# EAGLE board PicKat-pcb-v1 (EAGLE 7.1.0)
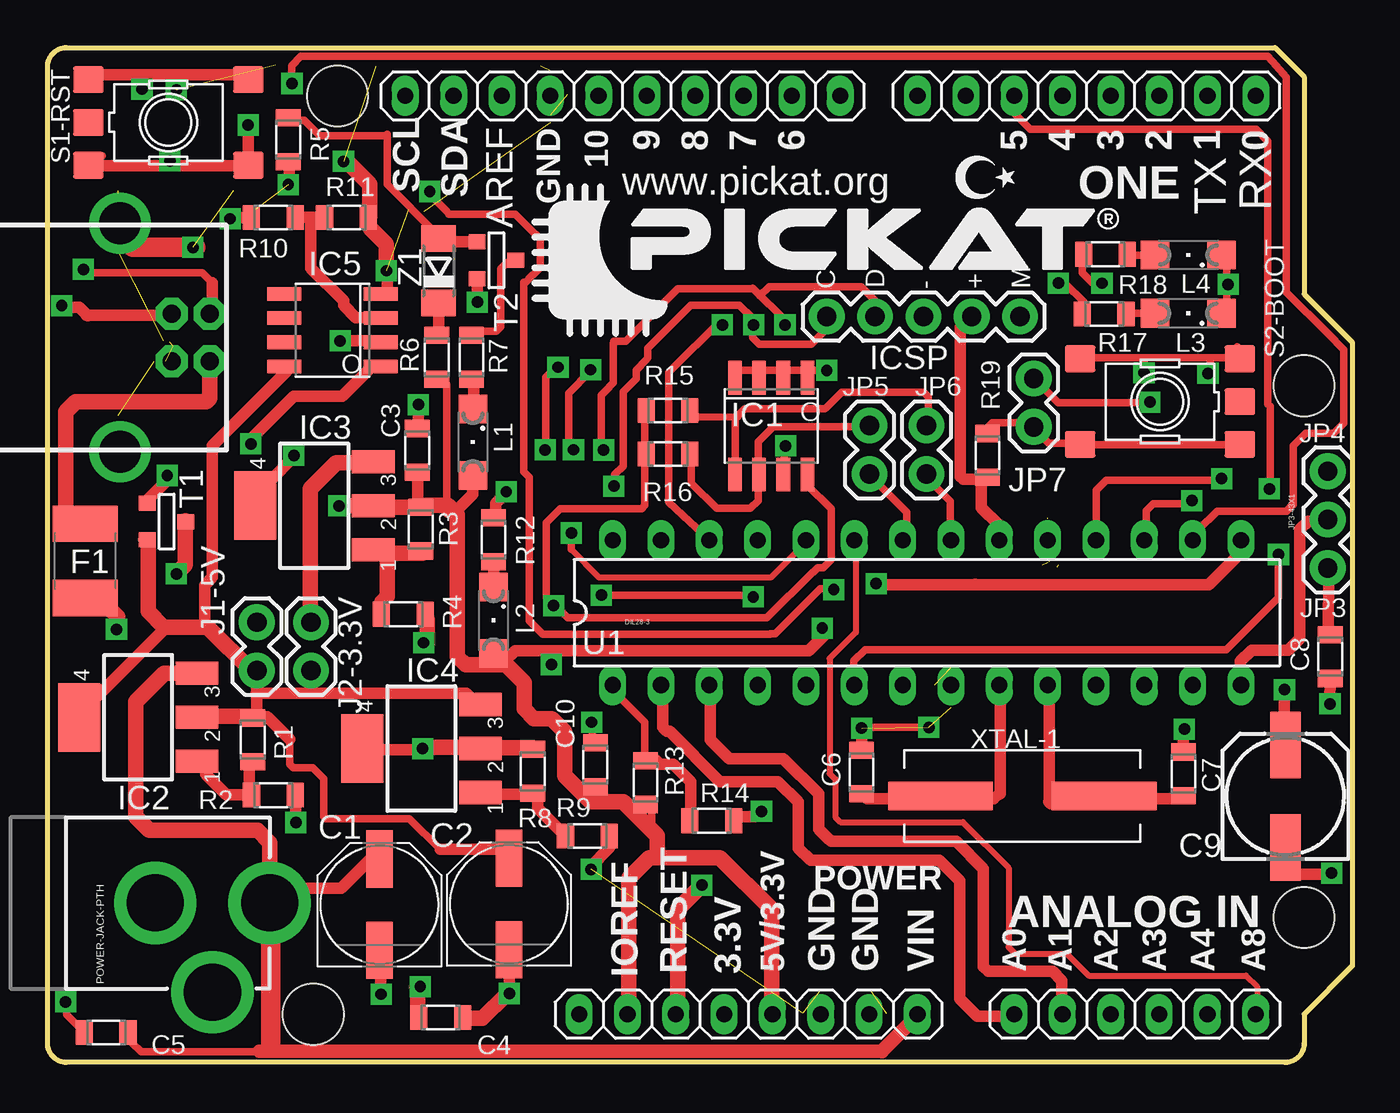
[diagram p0: board, top side]
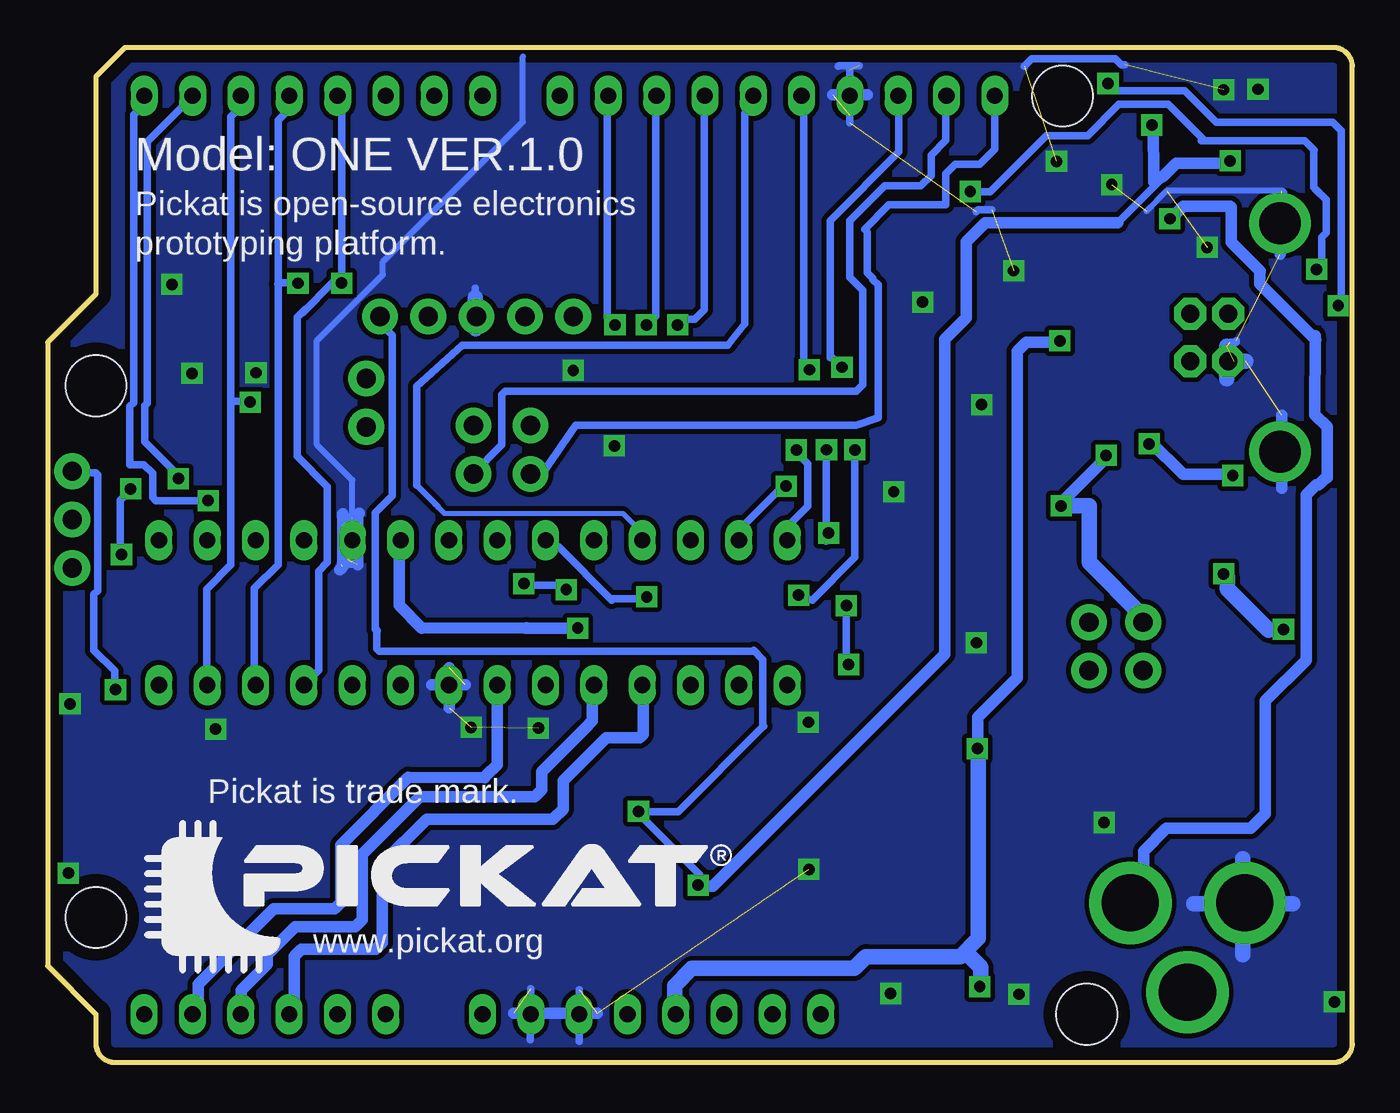
[diagram p1: board, bottom side, seen from below]

Size 68.58 x 53.34 mm. Coordinates in mm from the lower left corner, seen from the top.
Outline: 64.52,53.34 66.04,51.82 66.04,40.39 68.58,37.85 68.58,5.08 66.04,2.54 66.04,1 arc-90 65.04,0 1,0 arc-90 0,1 0,52.34 arc-90 1,53.34 64.52,53.34
Copper layers (1*16): Top 0.035mm / dielectric 1.5mm / Bottom 0.035mm
Design rules "default": minimum track width 10mil, minimum drill 22mil, track to track 10mil, track to pad 10mil, pad to pad 10mil, via to via 12mil, smd to smd 8mil, copper to edge 26mil, drill to drill 12mil, minimum pad ring 10mil, minimum via ring 10mil, stop-mask expansion 1mil, vias tented up to drill 30mil, thermal gap 10mil
Net classes: 0 default: width 0.254 mm, clearance 0.254 mm; 1 power: width 0.61 mm, drill 0.61 mm, clearance 0.254 mm; 2 gnd: width 0.305 mm, drill 0.559 mm, clearance 0.254 mm; 3 usbvcc: width 0.508 mm, drill 0.61 mm, clearance 0.254 mm; 4 aref: width 0.406 mm, drill 0.61 mm, clearance 0.254 mm
Holes 3.2 mm at 66.04,35.56 66.04,7.62 15.24,50.8 13.97,2.54

## Footprints (pad centres in the part's own frame; a part is rotated, then mirrored left to right if it is on the bottom)
1X06 = drill 0.85 pad 1.422 long: 1 -6.35,0; 2 -3.81,0; 3 -1.27,0; 4 1.27,0; 5 3.81,0; 6 6.35,0
PANASONIC_D = smd 3 x 1.4: + 2.4,0; - -2.4,0
WCAP-CSGP_0805_WAVE = smd 0.9 x 1.3: 1 -1.15,0; 2 1.15,0
153CLV-0605 = smd 3.5 x 1.6: + 2.7,0; - -2.7,0
L1812 = smd 1.9 x 3.4: 1 -1.95,0; 2 1.95,0
SO08-IRF = smd 0.72 x 1.78: 1 -1.905,-2.543; 2 -0.635,-2.543; 3 0.635,-2.543; 4 1.905,-2.543; 5 1.905,2.543; 6 0.635,2.543; 7 -0.635,2.543; 8 -1.905,2.543
SOT223 = smd 1.219 x 2.235: 1 -2.311,-3.099; 2 0,-3.099; 3 2.311,-3.099 | smd 3.6 x 2.2: 4 0,3.099
1X05 = drill 1.016 pad 1.88: 1 0,0; 2 2.54,0; 3 5.08,0; 4 7.62,0; 5 10.16,0
1X08 = drill 0.85 pad 1.422 long: 1 -8.89,0; 2 -6.35,0; 3 -3.81,0; 4 -1.27,0; 5 1.27,0; 6 3.81,0; 7 6.35,0; 8 8.89,0
1X10 = drill 0.85 pad 1.422 long: 1 -11.43,0; 2 -8.89,0; 3 -6.35,0; 4 -3.81,0; 5 -1.27,0; 6 1.27,0; 7 3.81,0; 8 6.35,0; 9 8.89,0; 10 11.43,0
1X02 = drill 1.016 pad 1.88: 1 0,0; 2 2.54,0
1X03 = drill 1.016 pad 1.88: 1 0,0; 2 2.54,0; 3 5.08,0
SML1206 = smd 1.5 x 1.5: A 1.75,0; C -1.75,0
POWER_JACK_PTH = drill 2.997 pad 4.318: GND 0,7.7; GNDBREAK 4.7,10.7; PWR 0,13.7
TS42 = smd 1.6 x 1.4: 1 -4.2,2.25; 2 4.2,2.25; 3 -4.2,-2.25; 4 4.2,-2.25; 5 -4.2,0
SOT-23 = smd 0.787 x 0.889: 1 0.025,-1.016; 2 -0.94,1.016; 3 0.991,1.016
DIL28-3 = drill 0.85 pad 1.422 long: 1 -16.51,-3.81; 2 -13.97,-3.81; 3 -11.43,-3.81; 4 -8.89,-3.81; 5 -6.35,-3.81; 6 -3.81,-3.81; 7 -1.27,-3.81; 8 1.27,-3.81; 9 3.81,-3.81; 10 6.35,-3.81; 11 8.89,-3.81; 12 11.43,-3.81; 13 13.97,-3.81; 14 16.51,-3.81; 15 16.51,3.81; 16 13.97,3.81; 17 11.43,3.81; 18 8.89,3.81; 19 6.35,3.81; 20 3.81,3.81; 21 1.27,3.81; 22 -1.27,3.81; 23 -3.81,3.81; 24 -6.35,3.81; 25 -8.89,3.81; 26 -11.43,3.81; 27 -13.97,3.81; 28 -16.51,3.81
PN61729 = drill 0.95 pad 1.676 octagon: 1 1.25,4.71; 2 -1.25,4.71; 3 -1.25,2.71; 4 1.25,2.71 | drill 2.2: P$1 -6,0; P$2 6,0
CRYSTAL-SMD-10.5X4.8-2PIN = smd 5.5 x 1.5: P$1 -4.3,0; P$2 4.3,0
SOD80C = smd 1.4 x 1.8: A 1.7,0; C -1.7,0

## Placement (x,y rotation side)
ADC-1X6  1X6-disi-HEADER-2  [1X06]  57.15,2.54 0 top
C1  100MF/25V SMD  [PANASONIC_D]  17.45,8.29 90 top
C2  100MF/25V SMD  [PANASONIC_D]  24.25,8.32 90 top
C3  220NF  [WCAP-CSGP_0805_WAVE]  19.43,32.17 270 top
C4  220NF  [WCAP-CSGP_0805_WAVE]  20.66,2.36 180 top
C5  100NF  [WCAP-CSGP_0805_WAVE]  3.08,1.57 0 top
C6  22PF  [WCAP-CSGP_0805_WAVE]  42.78,15.26 90 top
C7  22PF  [WCAP-CSGP_0805_WAVE]  59.7,15.16 90 top
C8  220NF  [WCAP-CSGP_0805_WAVE]  67.41,21.33 90 top
C9  100MF/25V SMD  [153CLV-0605]  65.06,13.99 90 top
C10  100NF  [WCAP-CSGP_0805_WAVE]  28.79,15.65 90 top
F1  500mA  [L1812]  1.98,26.36 90 top
IC1  24C02 SMD EEPROM  [SO08-IRF]  38.03,33.44 180 top
IC2  LM317-SMD-SOT223  [SOT223]  4.76,18.14 90 top
IC3  LM317-SMD-SOT223  [SOT223]  14.02,29.26 90 top
IC4  LM317-SMD-SOT223  [SOT223]  19.64,16.5 90 top
IC5  LM358 SMD  [SO08-IRF]  14.97,38.49 90 top
ICSP  BOS  [1X05]  40.95,39.2 0 top
IO-1X8  1x8-disi-HEADER-3  [1X08]  54.61,50.8 180 top
IO-1X10  1X10-disi-HEADER-4  [1X10]  30.23,50.8 180 top
J1-5V  1X2-12MM-ERKEK-HEADER-1  [1X02]  11,20.6 90 top
J2-3.3V  1X2-12MM-ERKEK-HEADER-2  [1X02]  13.85,20.6 90 top
JP3-43X1  1X3-12MM-ERKEK-HEADER-3  [1X03]  67.28,25.99 90 top
JP5  1X2-12MM-ERKEK-HEADER-4  [1X02]  43.2,30.93 90 top
JP6  1X2-12MM-ERKEK-HEADER-5  [1X02]  46.2,30.93 90 top
JP7  MALE-HEADER-6  [1X02]  51.83,33.41 90 top
L1  mavi-1206  [SML1206]  22.35,32.6 270 top
L2  KIRMIZI-1206  [SML1206]  23.44,23.24 270 top
L3  KIRMIZI-1206  [SML1206]  59.95,39.38 180 top
L4  KIRMIZI-1206  [SML1206]  59.96,42.44 180 top
POWER  1X8-disi-HEADER-1  [1X08]  36.83,2.54 0 top
POWER-JACK-PTH  POWER-JACK-2.1MM  [POWER_JACK_PTH]  -2.03,8.38 270 top
R1  330 OHM  [WCAP-CSGP_0805_WAVE]  10.79,16.96 270 top
R2  1K  [WCAP-CSGP_0805_WAVE]  11.87,14.05 180 top
R3  330 OHM  [WCAP-CSGP_0805_WAVE]  19.62,28.03 270 top
R4  560 OHM  [WCAP-CSGP_0805_WAVE]  18.7,23.56 0 top
R5  330 OHM  [WCAP-CSGP_0805_WAVE]  12.65,48.49 90 top
R6  1K  [WCAP-CSGP_0805_WAVE]  20.45,37.07 270 top
R7  1K  [WCAP-CSGP_0805_WAVE]  22.28,37.07 270 top
R8  330 OHM  [WCAP-CSGP_0805_WAVE]  25.49,15.31 270 top
R9  560 OHM  [WCAP-CSGP_0805_WAVE]  28.37,11.9 0 top
R10  10K  [WCAP-CSGP_0805_WAVE]  11.86,44.41 180 top
R11  10K  [WCAP-CSGP_0805_WAVE]  15.71,44.41 180 top
R12  1K  [WCAP-CSGP_0805_WAVE]  23.43,27.47 90 top
R13  10K  [WCAP-CSGP_0805_WAVE]  31.42,14.71 90 top
R14  470 OHM  [WCAP-CSGP_0805_WAVE]  34.91,12.7 0 top
R15  10K  [WCAP-CSGP_0805_WAVE]  32.61,34.26 180 top
R16  10K  [WCAP-CSGP_0805_WAVE]  32.61,31.98 180 top
R17  2.2K  [WCAP-CSGP_0805_WAVE]  55.53,39.34 180 top
R18  2.2K  [WCAP-CSGP_0805_WAVE]  55.6,42.47 180 top
R19  2.2K  [WCAP-CSGP_0805_WAVE]  49.4,31.91 90 top
S1-RST  SMD TACT sivic  [TS42]  6.35,49.4 0 top
S2-BOOT  SMD TACT sivic  [TS42]  58.47,34.73 180 top
T1  FDN340P-IRLML6402P-IRLML5203P-IRLML6401TRPBF  [SOT-23]  6.25,28.4 90 top
T2  BC847  [SOT-23]  23.59,42.13 90 top
U1  DIL28-3  [DIL28-3]  46.21,23.64 0 top
USB-B  USB-B  [PN61729]  3.81,38.1 270 top
XTAL1  20mhz smd 10.5X4.8-2-pin  [CRYSTAL-SMD-10.5X4.8-2PIN]  51.23,14 0 top
Z1  3.9V zener SOD80C  [SOD80C]  20.55,41.61 90 top

## Library data of the parts
ADC-1X6 IO-1X8 IO-1X10 POWER S1-RST S2-BOOT U1 USB-B = SmartPrj
C1 C2 F1 = rcl
C3-C8 C10 R1-R19 = Eagle_Wurth_Elektronik_Passive_Capacitors_rev15a
C9 = ref-packages
IC1 IC5 = transistor-fet
IC2-IC4 = linear
ICSP J1-5V J2-3.3V JP3-43X1 JP5-JP7 POWER-JACK-PTH XTAL1 = SparkFun
L1-L4 = led
T1 T2 = zetex
Z1 = diode

## Nets
5-GND: S1-RST.5
S$6: S1-RST.3

## Tracks (layer width: path | path; a pad name or v marks a point on that pad's centre or on a via)
GND  (via drill 0.6)  (23 unrouted)
  Top 0.61: v67.4,18.85 67.41,20.23 | v22.59,39.96 22.59,41.04
  Bottom 0.305: 3.72,45.81 9.75,45.81 10.82,44.74 | 52.56,28.56 52.56,30.61 54.42,32.47 54.42,37.94 50.96,41.4 50.96,42.07 43.59,49.44 43.59,52.86 | 53.16,26.16 53.14,26.16 52.84,26.47
  Bottom 0.406: 6.42,37.86 6.12,37.86 6.12,37.94 | 17.25,52.36 16.85,52.75 12.46,52.75 12.15,52.45 11.96,52.45 | 19.76,44.72 19.66,44.82 18.95,44.82 | 40.63,1.12 40.63,3.83 | 43.2,1.18 43.19,3.87 | 27.02,52.36 26.99,52.38 25.91,52.38 | 26.42,52.14 26.42,49.77 26.41,49.38 | 46.1,40.69 46.11,40.19
  Bottom 0.61: 52.58,28.63 52.58,26.28 52.61,26.31 52.61,26.28 | 3.78,42.49 3.78,45.63 3.72,45.69 | 3.71,30.18 3.72,34.02 | 5.71,10.78 5.78,10.72 | 3.08,8.41 3.14,8.35 | 39.7,2.58 44.08,2.58 | 25.5,50.86 27.31,50.86 | 47.47,20.74 47.47,18.65 | 46.64,19.84 48.38,19.84 | 52.28,26.16 52.28,28.78 52.2,28.86 | 53.08,28.83 53.08,26.06 53.24,25.9
  Bottom 0.813: 6.6,37.65 6.6,35.92 | 5.62,36.86 6.22,36.86 6.24,36.84 | 5.78,10.72 5.78,5.65 | 3.14,8.35 8.34,8.35 | 46.11,40.19 46.09,38.56
  other vias: 17.53,3.58 17.81,41.61 7.64,42.84 4.96,51.15 6.77,51.12 67.48,9.95 0.95,3.19 24.27,3.62 59.74,17.52 13.05,12.61 19.76,22.06 28.57,10.15 15.55,47.36 12.65,46.14 19.49,34.57 24.11,30 40.95,36.38 28.6,17.88 38.79,32.41 42.78,17.57 46.32,17.61 57.63,36.25 60.99,36.22 62.05,40.89
  pour Bottom (isolate 0.254): 0.7,0.39 65.41,0.39 65.41,2.83 65.41,2.83 68.29,5.72 68.29,37.5 65.47,40.32 65.47,51.81 64.13,53.16 1.23,53.16 0.52,52.45 0.52,0.58 0.66,0.43
S$1
  Top 0.61: 17.48,11.22 15.43,9.16 12.8,9.16
S$2
  Top 0.61: 17.49,3.58 17.52,3.62 17.52,4.69
S$3
  Top 0.61: 24.25,3.6 24.25,4.71
S$4
  Bottom 0.406: 53.12,41.06 53.12,50.17 53.15,50.2
S$5
  Top 0.813: 17.81,41.62 17.81,43 16.96,43.86
S$6
  Top 0.406: 2.88,47.66 S1-RST.3
S$7
  Top 0.406: 4.43,1.05 4.92,0.55 11.26,0.55 11.74,1.03
  Top 1.016: 11.74,1.03 11.74,6.32
S$8
  Bottom 0.61: 6.5,47.25 9.26,47.26 9.96,46.56
S$9
  Top 0.406: 1.01,3.19 1.01,2.5 1.77,1.74
S$10
  Top 0.7: 43.85,0.58 11.12,0.58
  Top 0.74: 45.74,2.47 43.85,0.58
S$11
  Top 0.813: 7.19,20.47 6.13,20.47 4.63,18.97 4.63,12.91 5.34,12.2 11.04,12.2 11.68,11.55 11.68,9.63
S$12
  Top 0.61: 10.63,18.19 10.71,18.11
  Top 0.813: 8.65,18.19 10.63,18.19
S$13
  Top 0.61: 10.59,14.27 10.59,15.63 10.55,15.67
S$14
  Top 0.61: 8.32,15.76 8.32,15.13 9.4,14.06 10.29,14.06 10.3,14.05
S$15  (via drill 0.6)
  other vias: 27.53,27.83
S$16
  Top 0.61: 13.05,12.58 13.05,13.78 13.01,13.81
S$17
  Top 0.406: 12.74,16.97 12.74,15.67 12.91,15.5 13.94,15.5 14.52,14.91 14.52,12.92 14.63,12.82 19.02,12.82 20.64,11.2
  Top 0.61: 11.06,18.18 11.54,18.18 12.74,16.97 | 20.64,11.2 23.76,11.2 23.83,11.13 23.84,11.13 23.84,11.14
S$18
  Top 0.61: 10.99,20.61 10.99,18.27 10.97,18.25
S$19
  Top 0.61: 13.87,20.66 13.87,19.51
S$20
  Top 0.61: 22.58,18.82 22.01,19.39 10.97,19.39
S$21
  Top 0.61: 23.33,16.58 23.38,16.54
  Top 0.813: 23.38,16.54 25.52,16.54
S$22
  Top 0.61: 27.21,11.92 25.77,13.36 25.77,13.94
S$23
  Top 0.61: 23.25,14.06 23.29,14.11 25.27,14.11
S$24
  Bottom 0.406: 55.14,19.82 54.34,20.62 54.34,25.81 53.9,26.25
S$25
  Top 0.61: 29.56,11.88 29.56,11.3 28.49,10.23
S$26
  Bottom 0.813: 35.63,2.56 35.63,4.04 34.72,4.95 26.18,4.95 25.57,5.57 20.62,5.57 19.67,6.52 19.67,16.33 19.63,16.37
S$27  (via drill 0.6)
  other vias: 19.71,16.5
S$28
  Top 0.813: 21.98,16.58 19.59,16.58
S$29
  Top 0.813: 33.11,2.39 33.11,8.04 34.14,9.07
S$30  (via drill 0.6)
  other vias: 34.39,9.32
S$31
  Top 0.813: 38.06,2.68 38.06,8.04 35.34,10.76 31.63,10.76 30.55,9.69 30.55,2.64 30.51,2.6
S$32
  Top 0.813: 13.81,23.05 13.81,30.15 15.17,31.51 16.9,31.51 17.02,31.63
S$33
  Top 0.813: 17.63,29.19 19.47,29.19 19.53,29.25
S$34
  Top 0.813: 17.92,26.75 19.7,26.75
S$35
  Top 0.813: 17.86,26.75 17.86,24.5 17.57,24.2
S$36
  Bottom 0.406: 51.27,22.69 51.35,22.78 51.35,26.3
S$37
  Top 0.813: 19.94,22 19.94,23.31 19.88,23.37
S$38
  Bottom 0.813: 11.04,23.07 11.04,23.49 13.83,26.28 13.83,29.25 14.96,29.25 15.02,29.31 14.96,29.31
S$39  (via drill 0.6)
  other vias: 15.31,29.25
S$40
  Top 0.813: 15.49,29.25 16.2,29.25 16.2,29.31
S$41  (via drill 0.6)
  other vias: 19.59,3.98
S$42
  Top 0.813: 19.47,2.5 19.47,3.92 19.41,3.98
S$43
  Bottom 0.813: 19.53,3.98 19.53,5 20.12,5.59
S$44
  Top 0.813: 22.02,2.32 22.85,2.32 24.1,3.57
S$45
  Top 0.813: 10.98,20.75 10.57,20.75
S$46
  Top 0.813: 10.86,20.57 10.75,20.57 8.43,22.89 6.12,22.89 5.28,23.72 5.28,27.34 5.16,27.46
S$47  (via drill 0.6)
  other vias: 6.77,25.68
S$48
  Top 0.813: 7.24,28.47 7.24,26.16 6.83,25.74
S$49  (via drill 0.6)
  other vias: 3.62,22.77
S$50
  Bottom 0.813: 6.59,25.56 6.59,24.9 4.39,22.71 3.5,22.77
S$51
  Top 0.813: 2.97,23.84 2.73,24.07
S$52
  Top 0.61: 8.25,23.06 8.25,25.09 8.66,25.5 8.66,32.4 12.58,36.32
S$53  (via drill 0.6)
  other vias: 6.29,30.85
S$54  (via drill 0.6)
  other vias: 10.68,32.52
S$55
  Bottom 0.61: 6.35,30.91 8.9,30.91 10.62,32.63
S$56
  Top 0.61: 6.23,30.79 6.23,30.55 5.28,29.6
S$57
  Top 0.61: 10.56,32.52 10.56,32.64 12.94,35.01 15.49,35.01 16.86,36.38
S$58
  Top 0.61: 4.48,42.84 3.79,43.53 3.79,43.48
  Top 1.016: 7.8,42.84 4.48,42.84
S$59
  Top 0.61: 17.86,41.61 17.86,40.54 17.92,40.48
S$60
  Bottom 0.61: 19.7,16.52 19.7,18.13 17.63,20.21 17.63,37.39 17.15,37.87 15.73,37.87
S$61  (via drill 0.6)
  other vias: 15.37,37.92
S$62
  Top 0.61: 15.43,37.92 17.27,37.92
S$63
  Top 0.813: 3.68,22.65 3.68,23.42 3.15,23.95
S$65
  Top 0.61: 17.03,39.14 16.21,39.14 15.56,39.79 15.56,40.03 13.84,41.75 13.84,44.4 13.87,44.43 | 13.19,44.43 13.87,44.43 | 13.87,44.43 14.49,44.43
S$66
  Bottom 0.61: 10.98,9.56 10.98,11.11 9.79,12.3 5.34,12.3 4.57,13.07 4.57,19.01 2.43,21.15 2.43,29.83 1.9,30.36 1.78,30.36 1.42,30.72
S$68
  Top 0.61: 9.55,44.39 10.78,44.39
S$69  (via drill 0.6)
  other vias: 9.6,44.34
S$70
  Top 0.813: 32.05,10.79 32.05,11.91 30.25,13.7 28.55,13.7 27.18,15.07 27.18,17.39 26.5,18.07 25.56,18.07 25.04,18.58 25.04,19.95 24.1,20.89 21.97,20.89 21.54,21.32 21.54,28.77 21.02,29.29 19.83,29.29 19.74,29.2
S$72
  Top 0.813: 16.92,44.45 16.92,46.16 15.73,47.36
S$73
  Top 0.61: 19.45,33.4 19.47,33.4 19.47,34.57
S$74
  Top 0.61: 19.59,29.31 19.47,29.31 19.47,30.92
S$75
  Bottom 0.406: 53.87,26.3 53.87,30.26 55.47,31.86 55.47,39.16 55.05,39.58
S$76
  Top 0.61: 12.74,46.11 12.7,46.11 12.7,47.06
S$77
  Top 0.61: 20.53,38.4 20.57,38.4 20.57,39.76
S$78
  Top 0.406: 20.41,43.59 17.85,46.15 17.85,48.79 17.77,48.71 14.3,48.71 13.48,49.53 12.95,49.53
S$79
  Top 0.406: 20.78,35.84 20.98,35.63 20.98,28.83
S$80
  Top 0.61: 22.59,43.14 21.11,43.14
S$81
  Bottom 0.406: 53.23,40.97 53.62,40.97 55.17,39.41
S$82
  Top 0.406: 24.55,42.03 24.14,42.03 23.82,41.71 23.82,38.66 23.57,38.42 22.79,38.42 22.75,38.37
S$83
  Top 0.61: 22.41,34.83 22.41,35.78 22.43,35.8
S$84
  Top 0.61: 22.36,30.24 22.36,29.86 21.46,28.97
S$85
  Top 0.61: 23.45,25.19 23.45,26.08 23.42,26.11
S$86
  Top 0.406: 54.45,39.67 54.45,39.97 53.5,40.93
S$87
  Top 0.61: 23.56,28.93 23.56,29.38 24,29.82
S$88
  Top 0.813: 8.54,36.75 8.54,34.92 8.35,34.73 1.48,34.73 0.95,34.2 0.95,28.93 1.07,28.81
S$89  (via drill 0.6)
  other vias: 12.85,51.45
S$90
  Top 0.406: 64.37,52.63 64.12,52.87 13.31,52.87 12.83,52.39 12.83,51.32
S$91  (via drill 0.6)
  other vias: 37.52,13.2
S$92
  Bottom 0.406: 34.31,9.25 34.31,9.88 37.49,13.05
S$93
  Top 0.406: 37.17,12.91 37.46,13.2
  Top 0.61: 36.17,12.91 37.17,12.91
S$94
  Top 0.406: 31.75,12.62 31.75,13.32
S$95
  Top 0.406: 31.38,15.93 31.38,17.88 29.93,19.33
S$96
  Top 0.61: 33.8,12.95 33.8,14.74 32.87,15.67 32.19,15.67 31.95,15.91
S$97
  Top 0.61: 31.95,15.91 31.91,15.95
S$98
  Bottom 0.254: 48.06,29.22 48.06,29.18 47.74,28.86 38.35,28.86 37.43,27.94
S$99
  Top 0.406: 10.76,51.91 10.76,51.7
  Top 0.61: 2.28,51.91 10.76,51.91
S$100
  Bottom 0.305: 48.06,29.21 48.23,29.38
S$101
  Top 0.61: 2.28,47.13 10.33,47.13
S$102  (via drill 0.6)
  Top 0.61: 10.61,47.2 10.54,47.2 v10.54,49.27 10.54,49.34
S$103  (via drill 0.6)
  other vias: 6.43,47.39
S$104
  Bottom 0.406: 12.32,44.14 9.76,46.7
  Bottom 0.61: 34.54,9.27 33.63,9.27 21.44,21.46 21.44,38.01 20.3,39.15 20.3,43.14 19.3,44.14 12.32,44.14
S$105
  Bottom 0.61: 10.47,49.41 10.45,46.29
S$106
  Top 0.61: 50.07,19.89 50.07,14.12
S$107
  Top 0.61: 52.63,19.82 52.63,13.69
S$108
  Top 0.61: 32.34,19.82 32.34,17.61 32.55,17.4 32.69,17.4 35.33,14.76 38.39,14.76 39.46,13.69 39.46,11.27 40.1,10.62 46.86,10.62 47.93,9.55 47.93,3.35 48.86,2.42 50.99,2.42 51.07,2.35
S$109
  Top 0.61: 34.83,19.82 34.83,16.97 35.83,15.97 38.67,15.97 40.52,14.12 40.52,12.26 41.09,11.69
S$110
  Top 0.61: 50.03,14.16 49.73,13.85 49.31,13.85
S$111
  Top 0.61: 52.61,13.71 52.71,13.61 53.16,13.61
S$112
  Top 0.61: 41.15,11.67 41.19,11.63 47.75,11.63 49.19,10.19 49.19,5.03 49.44,4.78 52.82,4.78 53.31,4.29 53.31,2.68
S$113
  Bottom 0.61: 37.27,19.8 37.27,17.24 37.45,17.06 39.23,17.06 41.49,14.8 41.49,13.32 42.02,12.78 48.66,12.78 50.98,10.46 50.98,6.3 51.34,5.95 55.26,5.95 55.61,5.59 55.61,2.62 55.97,2.26
S$114
  Bottom 0.61: 39.94,19.74 39.94,17.95 40.36,17.54 42.62,15.28 42.62,14.33 42.97,13.97 49.02,13.97 52.05,10.94 52.05,7.49 52.41,7.13 55.55,7.13 57.04,5.65 57.04,5.17 58.4,3.81 58.4,2.79
S$115
  Bottom 0.61: 45.61,14.95 49.62,14.98 53.18,11.42 53.18,8.38 53.48,8.09 56.68,8.09 60.66,4.11 60.66,2.97
S$116
  Bottom 0.61: 44.96,19.89 44.96,15.66 45.53,15.09
S$117
  Top 0.305: 42.48,27.57 42.48,22.61 41.11,21.24 41.11,15.18 41.4,14.89 41.4,12.9 41.66,12.63 48.1,12.63 50.51,10.23 50.51,6.06 50.86,5.71 53.57,5.71 54.71,4.57 62.98,4.57 63.57,3.98 63.57,2.82 63.53,2.78
S$118
  Top 0.61: 44.61,13.86 43.08,13.86 43.03,13.91
S$119
  Top 0.61: 59.7,13.86 57.82,13.86
S$120
  Top 0.406: 42.81,17.61 46.47,17.61
S$121
  Top 0.305: 39.84,27.32 38,25.48 29,25.48 27.52,26.96
  Top 0.406: 27.52,26.96 27.52,27.51 27.57,27.56 | 39.84,27.32
S$122
  Top 0.61: 42.8,17.58 42.8,16.55 42.77,16.53 42.77,16.5
S$123
  Top 0.61: 59.68,17.51 59.68,16.41 59.73,16.36
S$124  (via drill 0.6)
  other vias: 37.09,24.47
S$125
  Bottom 0.406: 12.88,51.41 12.54,51.07 8.81,51.07 7.16,49.42 6.57,49.42
S$126
  Top 0.61: 67.33,25.83 67.3,22.54
S$127
  Bottom 0.406: 42.37,27.09 41.73,27.09 38.94,24.3
S$128
  Bottom 0.406: 38.98,24.36 37.42,24.36 37.38,24.4
S$129
  Top 0.61: 67.53,9.9 65.5,9.9 65.45,9.95
S$130
  Top 0.61: 67.28,28.46 66.25,28.46 65.8,28.01 65.8,22.27 65.21,21.68 63.28,21.68 62.68,21.08 62.68,20.24 62.78,20.14
S$131  (via drill 0.6)
  Top 0.61: v65.01,19.6 65.01,18.06 65.16,17.92
S$132
  Bottom 0.406: 65.06,19.45 65.06,20.59 66.15,21.68 66.15,24.6 65.95,24.8 65.95,30.88 66.05,30.98 67.19,30.98 67.23,31.03
S$133
  Top 0.61: 23.8,21.4 24.33,21.4 24.57,21.64 40,21.64 40.83,22.47
S$134  (via drill 0.6)
  Bottom 0.61: v40.72,22.83 43.45,22.83
S$135
  Bottom 0.61: 43.41,22.84 48.9,22.83 50.09,24.02 50.09,27.23
S$136
  Top 0.406: 65.47,29.31 65.47,32.4 66.12,33.06 67.6,33.06 68.14,33.59 68.14,37.46 67.31,38.29 65.11,40.49 65.11,51.79 64.4,52.6
S$137
  Bottom 0.406: 6.63,49.43 1.04,49.43 0.59,48.98 0.59,39.92
S$138  (via drill 0.6)
  other vias: 29.1,24.56
S$142
  Top 0.61: 43.58,25.1 48.71,25.1 48.74,25.1 | 48.74,25.1 48.75,25.12 | 48.74,25.1 61.03,25.1 62.73,26.8
S$143  (via drill 0.6)
  other vias: 41.32,24.86
S$144
  Top 0.406: 37.97,22.52 26.02,22.52 25.32,23.22 25.32,30.77 25.03,31.06 25.03,40.99
S$145  (via drill 0.6)
  other vias: 20.09,45.77
S$146
  Top 0.406: 20.14,45.73 20.14,45.58 20.98,44.73
S$147
  Bottom 0.406: 41.36,25.09 43.53,25.09
S$148
  Bottom 0.406: 20.09,45.77 19.03,45.77 16.08,48.72 13.91,48.72 12.28,50.35 9.67,50.35 7.87,48.55
S$149
  Bottom 0.406: 7.95,48.44 2.51,48.44 2.02,47.95
S$150
  Bottom 0.406: 1.62,41.83 1.62,43.37 1.39,43.61 1.39,45.34 1.95,45.9
S$151
  Top 0.406: 2.12,41.52 8.12,41.52 8.65,40.98 | 8.65,39.54 8.74,39.45
  Top 0.61: 8.65,40.98 8.65,39.54
S$152  (via drill 0.6)
  other vias: 1.89,41.68
S$153
  Bottom 0.406: 2.05,47.96 2.05,46 1.75,45.7
S$154  (via drill 0.6)
  other vias: 0.74,39.78
S$155
  Top 0.61: 6.53,39.27 2.03,39.27
S$156
  Top 0.406: 42.38,20.16 42.38,21.11 42.97,21.7 61.96,21.7 64.69,24.44 64.69,26.64 64.63,26.7
S$157  (via drill 0.6)
  other vias: 64.69,26.7
S$158  (via drill 0.6)
  other vias: 64.22,30.14
S$159
  Bottom 0.406: 64.75,26.7 64.75,29.55 64.22,30.08
S$160
  Top 0.406: 64.26,30.15 64.26,34.48 64.14,34.6 64.14,48.42 63.52,49.04 51.65,49.04 50.78,49.9
S$161
  Bottom 0.406: 28.46,24.33 28.83,24.33 28.85,24.31
S$162
  Bottom 0.406: 57.71,19.84 57.71,24.91 56.47,26.15 56.47,49.53 55.85,50.15
S$163
  Bottom 0.406: 60.22,19.84 60.22,24.87 58.94,26.15 58.94,49.7 58.32,50.32
S$164
  Top 0.406: 57.75,27.43 57.75,28.99 58.12,29.36 59.64,29.36 59.68,29.41
S$165  (via drill 0.6)
  Bottom 0.406: v60.14,29.53 62.9,29.53 63.06,29.7 63.06,30.97 63.52,31.43 64.26,31.43 64.26,34.48 64.05,34.69 64.05,49.82 63.35,50.52
S$166
  Top 0.406: 55.11,27.47 55.11,30.07 55.65,30.6 61.58,30.6 61.62,30.56
S$167  (via drill 0.6)
  other vias: 61.7,30.68
S$168
  Bottom 0.406: 61.74,30.68 61.74,30.89 63.48,32.62 63.48,34.52 63.35,34.64 63.35,48.38 61.29,50.44
S$169  (via drill 0.6)
  other vias: 57.93,34.7
S$170
  Bottom 0.406: 57.97,34.74 58.79,34.74 58.83,34.77
S$171
  Top 0.406: 58,34.67 53.13,34.67 51.89,35.91
S$172
  Top 0.406: 51.51,33.64 52.61,32.54 54.16,32.54
S$173
  Top 0.406: 54.81,32.47 62.74,32.47
S$174
  Top 0.406: 29.12,24.55 36.89,24.55 36.91,24.52
S$176
  Top 0.406: 54.53,37.04 62.6,37.04
S$177
  Top 0.406: 62.54,37.11 62.54,37.63
S$178
  Top 0.61: 49.98,28.25 49.08,29.16 49.08,30.6
S$179
  Top 0.406: 49.2,33.16 49.65,33.61 51.51,33.61
S$180
  Top 0.406: 57.65,36.11 57.65,36.91 57.72,36.97
S$181
  Top 0.406: 61.12,36.05 61.12,36.94 61.19,37.01
S$182  (via drill 0.6)
  other vias: 55.42,40.95
S$183  (via drill 0.6)
  other vias: 53.12,40.96
S$185
  Top 0.406: 61.98,42.4 61.98,39.69
S$186
  Top 0.406: 57.72,42.44 57.1,42.44 57.03,42.51
S$187
  Top 0.406: 57.65,39.38 57.07,39.38 57.03,39.34
S$188
  Top 0.406: 54.29,39.34 54.32,39.38
S$190
  Top 0.406: 55.43,40.97 54.91,40.97 54.38,41.51 54.38,42.2 54.3,42.28
S$191
  Bottom 0.406: 55.45,40.97 56.4,40.97 56.48,40.89
S$192
  Top 0.406: 47.43,27.47 47.43,29.5 46.15,30.78
S$193
  Top 0.406: 45.16,27.42 45.16,28.91 43.13,30.93
S$194
  Top 0.406: 46.29,33.41 46.29,34.99 46.05,35.24 41.74,35.24 40.95,34.45 40.85,34.35 36.65,34.35 36.16,33.85 36.16,31.58 36.1,31.53
S$195
  Top 0.406: 43.23,33.41 38.13,33.41 37.34,32.61 37.34,31.38 37.39,31.33 37.39,31.28
S$198
  Top 0.406: 33.84,31.8 33.84,30.44 35.16,29.12 36.93,29.12 37.35,29.53 37.35,30.44 37.39,30.48
S$199
  Top 0.406: 36.2,36.38 40.85,36.38
S$200
  Top 0.406: 33.88,34.19 34.17,33.9 36.27,33.94
S$201  (via drill 0.6)
  other vias: 26.48,20.92
S$202  (via drill 0.6)
  Bottom 0.406: 26.48,20.86 26.6,20.98 v26.6,24.01
S$203
  Top 0.406: 26.3,24.36 26.6,24.07
S$204
  Top 0.406: 39.91,30.55 39.91,30.37 41.18,29.1 41.18,26.42 40.76,26.01 40.49,26.01 40.25,25.77 40.22,25.77 37.81,23.37 27.34,23.37 26.68,24.02
S$205
  Top 0.406: 26.5,21.16 26.5,21.58
S$206
  Bottom 0.406: 43.23,31.02 42.52,31.02 40.81,33.5 26.07,33.5 24.93,33.88 24.93,40.86 25.21,41.15 25.21,41.22 25.5,41.51 25.5,43.65 25.64,43.79 24.36,45.07 21.37,45.07 21.37,46.71 20.87,47.21 19.59,47.21 18.8,48 18.8,50.56
S$207
  Bottom 0.406: 46.24,30.92 44.7,32.46 44.7,35.1 44.53,35.27 26.07,35.27 25.73,35.61 25.73,40.59 26.41,41.28 26.41,44.24 24.58,46.08 22.68,46.08 22.15,46.61 22.15,47.68 21.37,48.46 21.37,50.48
S$208
  Bottom 0.406: 26.16,32.17 26.16,26.54 28.4,24.3
S$209
  Bottom 0.406: 26.89,36.54 26.89,36.59 27.37,37.06
S$210  (via drill 0.6)
  other vias: 26.83,36.54
S$211  (via drill 0.6)
  other vias: 26.15,32.2
S$212
  Bottom 0.406: 28.84,50.74 28.84,36.75 28.56,36.47
S$213
  Bottom 0.406: 27.45,37.04 27.45,44.25 23.84,47.86 23.84,50.53
S$216  (via drill 0.6)
  other vias: 27.64,32.2
S$217  (via drill 0.6)
  other vias: 28.54,36.41
S$218
  Top 0.406: 26.18,32.23 26.18,36.01 26.73,36.56
S$219
  Bottom 0.406: 27.53,32.15 27.64,32.03 27.64,27.4
S$220
  Top 0.406: 38.73,32.24 38.73,31.55 38.7,31.52
S$221
  Bottom 0.305: 48.05,29.21 49.19,30.34
  Bottom 0.406: 49.19,30.34 49.19,35.53 46.78,37.7 32.84,37.7 31.95,38.83 31.95,49.89 31.46,50.37
S$222
  Top 0.406: 28.53,36.33 27.39,35.18 27.39,32.15
S$225
  Top 0.406: 34.82,27.42 32.65,29.45 32.65,36.23
S$226
  Top 0.406: 32.66,36.18 32.66,36.26 35.44,39.04
S$227  (via drill 0.6)
  other vias: 35.47,38.77
S$228
  Bottom 0.406: 35.81,39.06 34.57,39.06 34.08,39.55 34.08,49.99 33.93,50.14
S$229  (via drill 0.6)
  other vias: 29.22,32.19
S$230
  Top 0.406: 31.23,34.41 31.35,34.29
S$231
  Top 0.406: 31.39,34.12 31.39,29.29 31.22,29.11 26.96,29.11 26.21,28.37 26.21,24.42 26.61,24.02
S$232  (via drill 0.6)
  other vias: 29.76,30.29
S$233
  Bottom 0.406: 32.31,27.68 32.31,27.91 29.93,30.29
S$234
  Bottom 0.406: 29.59,27.39 29.59,28.25 28.62,29.23 28.62,31.46 29.19,32.03
S$235
  Top 0.406: 29.1,32.23 29.1,35.07 29.53,35.5 29.53,35.52 29.73,35.73 29.73,37.79
S$236
  Top 0.406: 29.82,30.32 29.82,30.92 30.25,31.35 30.25,35.24 30.93,35.93 30.93,36.38 31.46,36.94
S$237  (via drill 0.6)
  other vias: 37.11,38.77
S$238  (via drill 0.6)
  other vias: 38.76,38.77
S$239
  Top 0.406: 31.54,37.04 31.54,37.53 33.81,39.8 36.37,39.8 37.02,39.14
S$240
  Top 0.406: 29.77,37.9 30.39,37.9 33.06,40.6
S$241
  Bottom 0.406: 37.07,38.77 36.61,39.22 36.61,50.69
S$242
  Bottom 0.406: 38.8,38.77 39.17,39.14 39.17,50.73
S$243
  Top 0.406: 37.08,40.7 38.84,38.93
S$244
  Top 0.406: 33.09,40.64 33.12,40.66 37.1,40.66
S$245
  Bottom 0.406: 51.11,38.86 50.46,38.21 50.46,29.79 51.35,28.9 51.35,26.25
S$250
  Bottom 0.406: 51.28,22.75 51.28,21.75 51.14,21.61 31.53,21.61
S$252
  Top 0.406: 47.98,30.79 48.12,30.65
  Top 0.61: 47.98,38.55 47.98,30.79 | 48.12,30.65 49.56,30.65
S$254
  Top 0.406: 43.62,39.15 43.62,39.94 42.78,40.78 37.93,40.78 37.44,40.29
S$255
  Top 0.406: 37.06,38.75 37.06,38.08 37.41,37.74 40.12,37.74 40.99,38.6
S$256
  Top 0.406: 41.2,24.9 40.6,24.9 38.24,22.54 37.99,22.54 37.96,22.52
S$258
  Top 0.406: 28.63,16.95 28.63,17.91
S$259
  Top 0.406: 1.79,19.2 2.56,19.2
  Top 0.61: 2.56,19.2 6.28,22.92
S$260
  Top 0.406: 6.42,47.07 6.39,47.09
S$261  (via drill 0.6)
  other vias: 12.95,31.9
S$262
  Bottom 0.406: 15.39,29.27 15.39,29.33
  Bottom 0.61: 15.39,29.33 12.95,31.78
S$263
  Top 0.406: 12.95,32.04 12.95,31.84
  Top 0.61: 12.95,31.84 11.67,30.56
S$264
  Top 0.406: 17.24,16.44 17.2,16.4
  Top 0.61: 19.73,16.44 17.24,16.44
S$265
  Bottom 0.61: 9.45,44.49 9.45,44.44 8.9,44.99 6.43,44.99 6.38,44.94 6.38,43.11 4.84,41.57
S$266
  Bottom 0.61: 1.95,38.2 1.98,34.04 1.34,33.4 1.34,30.72
S$267
  Top 0.61: 2.12,39.26 1.68,39.69 0.74,39.69
S$268
  Bottom 0.61: 1.93,37.99 4.87,40.94 4.87,41.6
S$271  (via drill 0.6)
  other vias: 43.55,25.16
S$272
  Top 0.406: 65.45,29.33 65.12,29
S$273
  Top 0.406: 60.48,28 61.47,28.98 65.12,28.98
S$274
  Top 0.406: 25.6,43.55 24.58,44.57 21.09,44.57
S$275
  Top 0.406: 25.66,43.53 25.86,43.32
S$276
  Top 0.406: 25.5,41.39 25.02,40.91
S$277
  Top 0.406: 25.9,43.35 25.9,41.76 25.54,41.39
S$278
  Bottom 0.406: 37.55,13.19 35.44,13.19 30.99,17.64 | 30.99,17.64 30.95,17.68 | 31.47,21.65 30.99,21.17 30.99,17.64
S$279
  Top 0.61: 47.97,38.64 48.13,38.8 48.13,38.81

## Text on the board
bPlace: D:/elektronik-projeler/arduino/pickat/görseller/Pickat-Logo/Pickat-Logo/PicKat-logo.bmp | D:/elektronik-projeler/arduino/pickat/görseller/Pickat-Logo/Pickat-Logo/PicKat-logo.bmp | D:/elektronik-projeler/arduino/pickat/görseller/Pickat-Logo/Pickat-Logo/PicKat-logo.bmp | D:/elektronik-projeler/arduino/pickat/görseller/Pickat-Logo/Pickat-Logo/PicKat-logo.bmp
tNames: AREF | GND | 10 | 9 | 8 | 7 | 6 | 5 | 4 | 3 | 2 | 1 | 0 | SCL | www.pickat.org | SDA | ONE | TX | RX | C | D | - | + | M | O | O | JP4 | JP3 | XTAL-1 | C1 | C2 | ANALOG IN | RESET | 3.3V | 5V/3.3V | GND | GND | VIN | A0 | A1 | A2 | A3 | A4 | A8 | IOREF | D:/elektronik-projeler/arduino/pickat/görseller/Pickat-Logo/Pickat-Logo/PicKat-logo.bmp | D:/elektronik-projeler/arduino/pickat/görseller/Pickat-Logo/Pickat-Logo/bayrak-logo.bmp
bNames: Model: ONE VER.1.0 | Model: ONE VER.1.0 | Pickat is open-source electronics | prototyping platform. | Pickat is trade mark. | www.pickat.org
214bmp: D:/SmartProjects/Snc/a4_bn_logo2.bmp